# EAGLE board Nusbio1.0.WaveShare (EAGLE 7.4.0)

Size 34 x 45 mm. Coordinates in mm from the lower left corner, seen from the top.
Outline: 4,0 0,0 0,4
Outline: 29,0 34,0 34,4
Outline: 34,41 34,45 30,45
Outline: 5,45 0,45 0,41
Outline: 0,41 arc-90 4,45 5,45
Outline: 5,45 30,45
Outline: 30,45 arc-90 34,41
Outline: 34,41 34,4
Outline: 34,4 arc-90 30,0 29,0
Outline: 29,0 4,0
Outline: 4,0 arc-90 0,4
Outline: 0,4 0,41
Copper layers (1*16): Top 0.035mm / dielectric 1.5mm / Bottom 0.035mm
Design rules "default": minimum track width 10mil, minimum drill 24mil, track to track 8mil, track to pad 8mil, pad to pad 8mil, via to via 8mil, smd to smd 8mil, copper to edge 40mil, drill to drill 8mil, minimum pad ring 10mil, minimum via ring 8mil, stop-mask expansion 4mil, vias tented up to drill 0mil, thermal gap 10mil
Holes 3.2 mm at 3,3.5 31,3.5 3,31.5 31,31.5

## Footprints (pad centres in the part's own frame; a part is rotated, then mirrored left to right if it is on the bottom)
1X05 = drill 1.016 long: 1 -5.08,0; 2 -2.54,0; 3 0,0; 4 2.54,0; 5 5.08,0
1X06 = drill 1.016 octagon: 1 -6.35,0; 2 -3.81,0; 3 -1.27,0; 4 1.27,0; 5 3.81,0; 6 6.35,0
1X10-BIG = drill 1.016 pad 1.778 octagon: 1 -11.43,0; 2 -8.89,0; 3 -6.35,0; 4 -3.81,0; 5 -1.27,0; 6 1.27,0; 7 3.81,0; 8 6.35,0; 9 8.89,0; 10 11.43,0

## Placement (x,y rotation side)
CBUS_PINS  [1X05]  25,8 90 top
F_HEADER  [1X06]  17,38 180 top
L_HEADER  [1X05]  9,8 270 top
U$1  PINHD-1X10  [1X10-BIG]  17,43 180 top

## Library data of the parts
CBUS_PINS L_HEADER = pinhead
F_HEADER U$1 = adafruit

## Nets
CTS_G4: F_HEADER.6 U$1.5
DCD_G3: L_HEADER.2 U$1.4
DSR_G1: L_HEADER.3 U$1.2
DTR_G2: L_HEADER.5 U$1.3
GND: F_HEADER.2 U$1.10
NUSBIO_VCC: F_HEADER.1 U$1.9
RESET: L_HEADER.1
RI_G0: L_HEADER.4 U$1.1
RTS_G7: F_HEADER.5 U$1.8
RX_G6: F_HEADER.4 U$1.7
TX_G5: F_HEADER.3 U$1.6

## Tracks (layer width: path | path; a pad name or v marks a point on that pad's centre or on a via)
CTS_G4  (1 unrouted)
DCD_G3  (1 unrouted)
DSR_G1  (1 unrouted)
DTR_G2  (1 unrouted)
GND  (1 unrouted)
NUSBIO_VCC  (1 unrouted)
RI_G0  (1 unrouted)
RTS_G7  (1 unrouted)
RX_G6  (1 unrouted)
TX_G5  (1 unrouted)

## Text on the board
tNames: GND | VCC | 7 | 6 | 5 | 4 | 3 | 2 | 1 | 0 | v1.0 /w | Nusbio | MadeInTheUSB.net
bNames: PCBv1 FT-2016-07 | MadeInTheUSB.net